# Altium PCB PCB2.PcbDoc
Units mm, origin at the board's own origin, x right, y up, seen from the top; angles counter-clockwise.
Board outline 55 x 110 mm, 2 copper layers (Top Layer, Bottom Layer); 8 components, 4 nets, 68 pads, 79 vias.
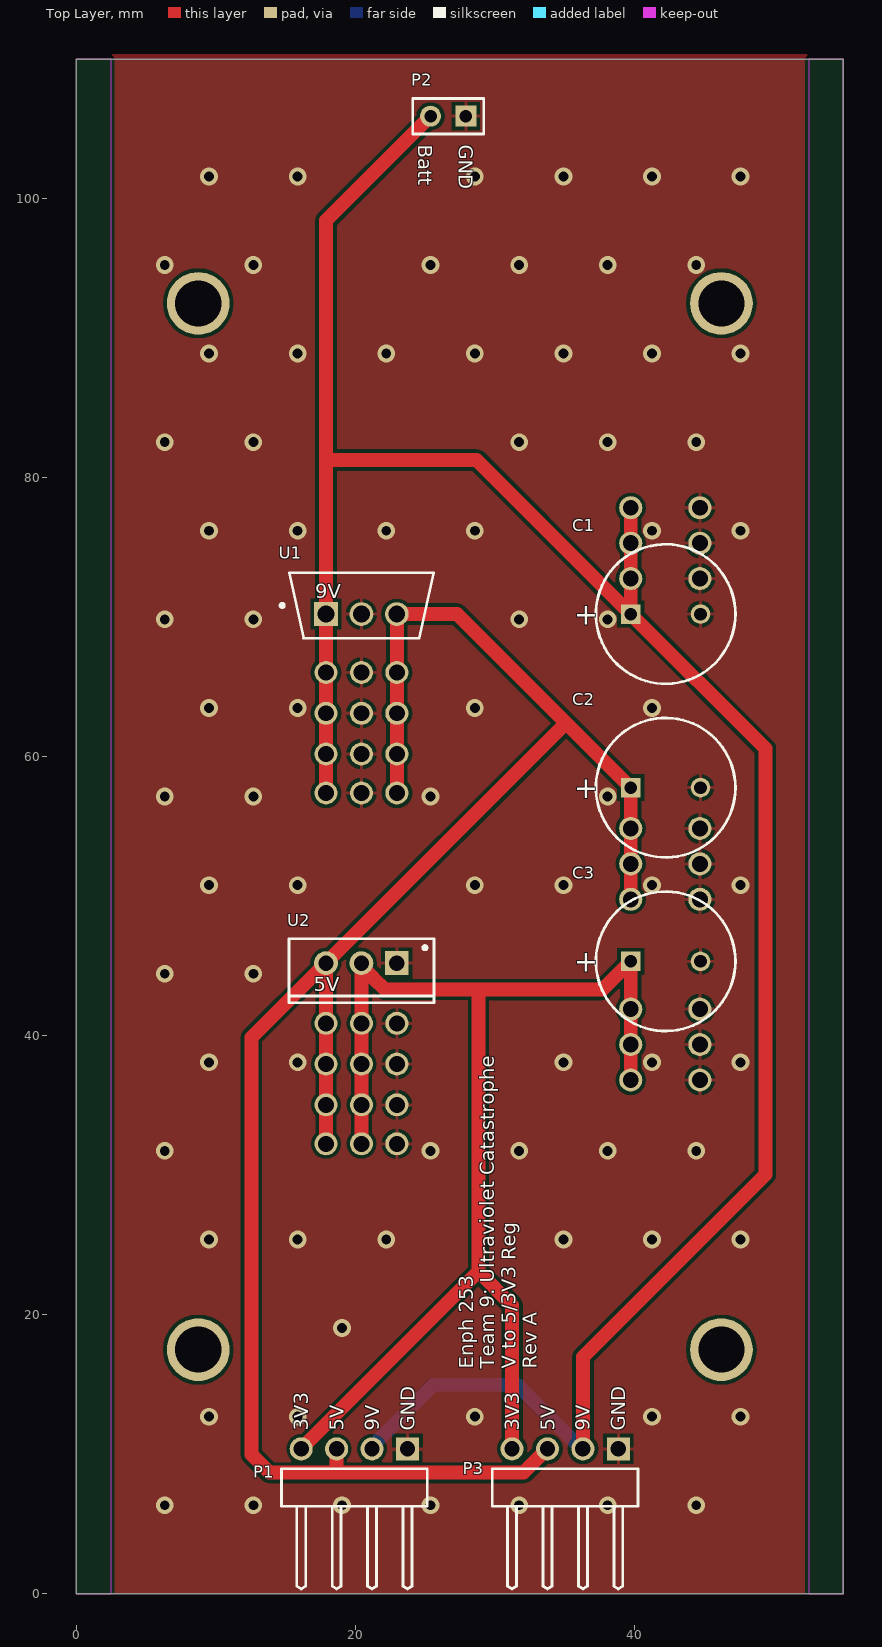
[diagram p0: Top Layer view]
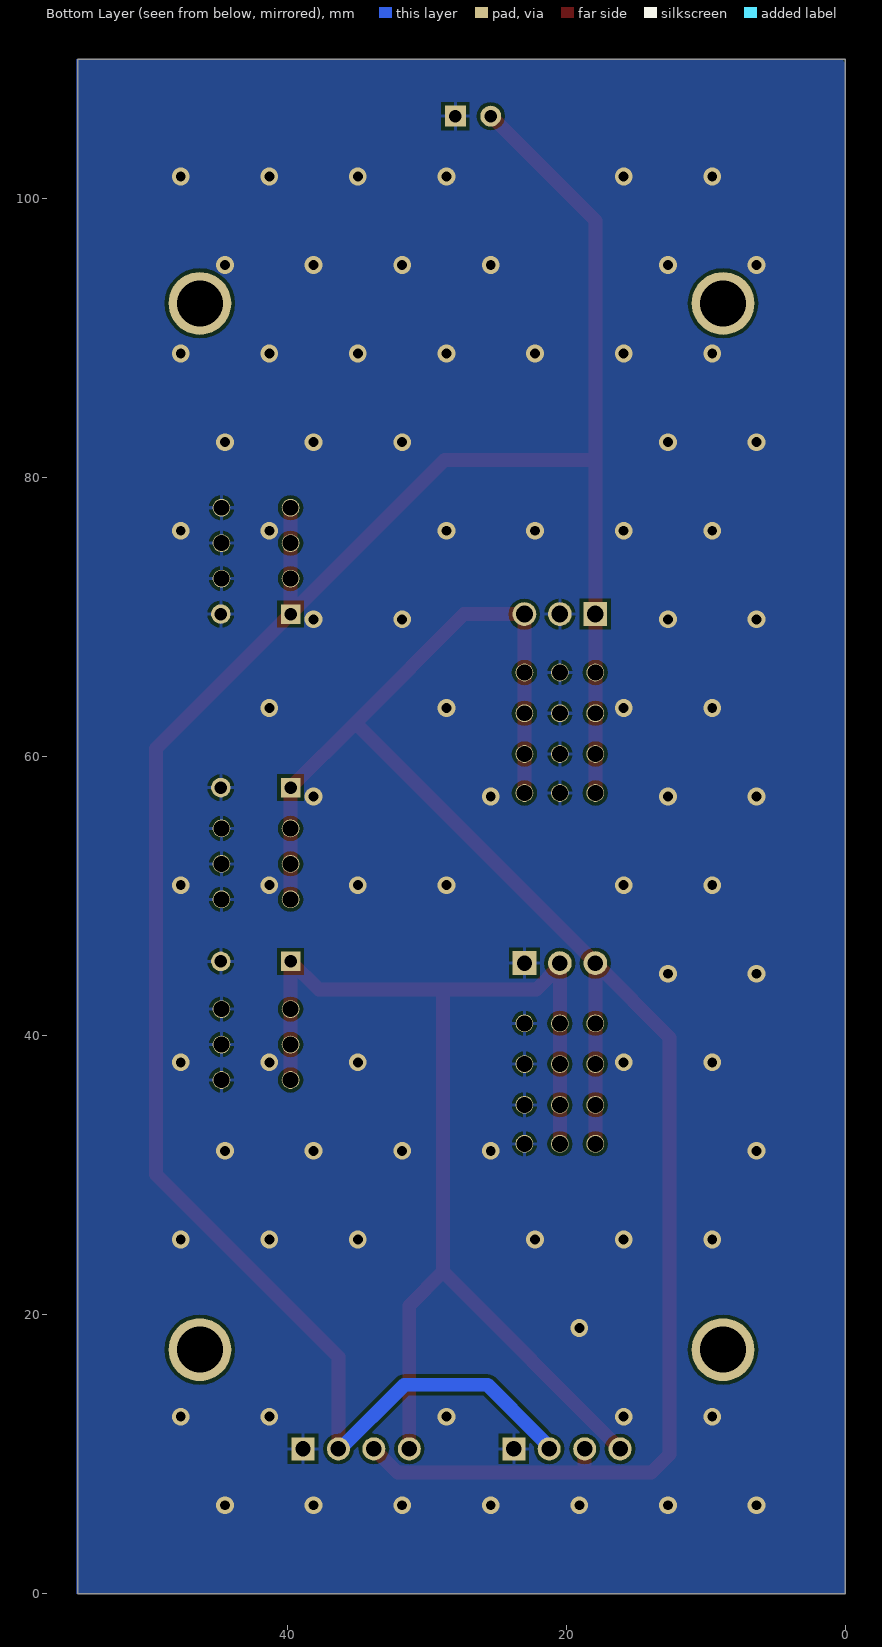
[diagram p1: Bottom Layer view, seen from below]

## Layer stack, top to bottom
Top Solder: solder mask 0.0102, Solder Resist, Dk 3.5
Top Layer: signal copper 0.0356
Dielectric 1: dielectric 0.32, FR-4, Dk 4.8
Bottom Layer: signal copper 0.0356
Bottom Solder: solder mask 0.0102, Solder Resist, Dk 3.5

## Board outline
0,0 0,110 55,110 55,0

## Design rules (kind name [scope] priority, off if disabled: settings)
Clearance [All] p1: gap=0.254 ignorepadtopadclearanceinfootprint=FALSE except(0: Arc-Hole Track-Hole SMDPad-Hole THPad-Hole Via-Hole Fill-Hole Poly-Hole Region-Hole Text-Hole)
PolygonConnect [All] p1: connectstyle=Relief reliefconductorwidth=0.254 reliefentries=4 polygonreliefangle="90 Angle" airgapwidth=0.254
RoutingVias [All] p1: holewidth=0.711 width=1.27 viastyle="Through Hole" minholewidth=0.711 minwidth=1.27 maxholewidth=0.711 maxwidth=1.27
SolderMaskExpansion [All] p1: expansion=0.102 istentingtop=FALSE
Width Width_Power [InNet('5V')   or InNet('3.3V')or InNet('9V')or InNet('GND')] p1: maxlimit=1 minlimit=1 preferedwidth=1 minimp=50.000000 maximp=50.000000 favimp=50.000000
Width [All] p2: maxlimit=0.254 minlimit=0.254 preferedwidth=0.254
30 further rules are at their usual default settings.

## Components (designator, comment, footprint, x,y, rotation, side; value= is the part's Value field where it differs from the comment)
C1 "ECA-2AM101" CAPPR65-500-1600X1000X1700 42.251,70.231 r0 top locked value=100µF
C2 "ECA-2AM101" CAPPR65-500-1600X1000X1700 42.251,57.785 r0 top locked value=100µF
C3 "ECA-2AM101" CAPPR65-500-1600X1000X1700 42.251,45.339 r0 top locked value=100µF
P1 "61300411021" 61300411021 19.939,7.62 r0 top locked
P2 "Header 2" HDR1X2 27.94,105.918 r180 top locked
P3 "61300411021" 61300411021 35.052,7.62 r0 top locked
U1 "UA7805CKCS" FP-KCS0003B-MFG 20.447,70.848 r90 top locked
U2 "LD1117V33" TO220 20.447,45.212 r180 top locked

## Footprints (in the part's own frame and the unit in brackets; to place one, negate y for a bottom-side part, rotate by r counter-clockwise, add the part's x,y. Pads: shape width x height; smd on the part's side, far side on the other; paste and mask are expansions set on the pad)
61300411021 [mm] "Pin Header, pitch 2.54 mm, THT, Angled, single row, 4p"
  rect 1.65x1.65 hole 1.1: 1(3.81,2.77)
  round 1.65 hole 1.1: 2(1.27,2.77) 3(-1.27,2.77) 4(-3.81,2.77)
  silkscreen extent -5.23,-7.27 5.23,1.35, body extent -5.08,-7.27 5.08,3.09, height 2.58
CAPPR65-500-1600X1000X1700 [mm] "THD, 2-Leads, Dia 10mm, Body Length 16mm"
  rect 1.4x1.4 hole 0.9: 1(-2.5,0)
  round 1.4 hole 0.9: 2(2.5,0)
  silkscreen extent -5,-5 5,5, body extent -5,-5 4.95,5, height 17
FP-KCS0003B-MFG [mm]
  rect 1.7x1.7 hole 1.2 paste-1000 mask+0: 1(-0.617,2.54)
  round 1.7 hole 1.2 paste-1000 mask+0: 2(-0.617,0) 3(-0.617,-2.54)
  silkscreen extent -2.35,-5.18 2.35,5.8, body extent -2.45,-5.28 2.45,5.28, height 0.25
HDR1X2 [mm] "Connector; Header; 2 Position"
  rect 1.5x1.5 hole 0.9: 1(0,0)
  round 1.5 hole 0.9: 2(2.54,0)
  silkscreen extent -1.27,-1.27 3.81,1.27
TO220 [mm] "TO, Thru-Hole, Vertical, Heatsink Mounted; 3 In-Line Leads; Pitch 2.54 mm"
  rect 1.7x1.7 hole 1.1: 1(-2.54,0)
  round 1.7 hole 1.1: 2(0,0) 3(2.54,0)
  silkscreen extent -5.2,-1.75 5.2,2.85, body extent -5.25,-1.8 5.25,2.9, height 19.7

## Part data
C1 C2 C3: library part CMP-001-00034-7, "Aluminum Electrolytic Capacitor, 100 uF, +/- 20%, 100 V, -40 to 85 degC, 2-Pin THD, RoHS, Bulk", Capacitor Type=Electrolytic, Case/Package=Radial, Manufacturer=Panasonic, Max Operating Temperature=85°C, Min Operating Temperature=-40°C, Package Description="2-Pin Through Hole Device, Dia 10 mm, Body Length 16 mm", Package Quantity=200, Package Reference=CAPPR65-500-1600X1000X1700, Ripple Current=350mA, Tolerance=20%, Voltage Rating=100V, Datasheet URL=https://industrial.panasonic.com/cdbs/www-data/pdf/RDF0000/ABA0000C1047.pdf, Datasheet Version=Mar-16, Diameter=10mm, Lead Pitch=5mm, Manufacturer URL=http://www.panasonic.com/, Mounting Technology=TH, Packaging=Bulk, Pins=2, Ripple Current (AC)=350mA, RoHS Compliant=True
P1 P3: library part CMP-1502-01063-1, "THT Angled Pin Header WR-PHD, Pitch 2.54 mm, Single Row, 4 pins", Contact Resistance=20mOhm, Manufacturer="Wurth Elektronik", Operating Temperature=-40to105degC, Rated Current=3A, Withstanding Voltage=500VAC, Working Voltage=250VAC, Datasheet URL=https://katalog.we-online.de/em/datasheet/6130xx11021.pdf, Gender=Male, Manufacturer URL=http://www.we-online.de, Mounting Technology=THT, Orientation=Angled, Package Reference=61300411021, Packaging=Bag, Part Number=61300411021, Pin Number=4, Pitch=2.54mm, Publisher=WurthElektronik, Row Number=Single
P2: "Header, 2-Pin", LatestRevisionDate=17-Jul-2002, LatestRevisionNote="Re-released for DXP Platform.", Publisher="Altium Limited"
U1: library part CMP-04917-000031-1, "IC REG LINEAR 5V 1.5A TO220-3", Dropout Voltage=2V, Manufacturer="Texas Instruments", Max Junction Temp=+125°C, Max Supply Voltage=25V, Min Supply Voltage=7V, Output Current=1.5A, Output Voltage=5V, Package=KCS0003B, Temperature="0°C to +125°C", Temperature Range Low=0°C, Automotive=No, Category=IC, ComponentLink2Description=Datasheet, ComponentLink2URL=http://www.ti.com/lit/ds/symlink/ua78.pdf, Device Class L1="Integrated Circuits (ICs)", Device Class L2="Power Management ICs", Device Class L3="Voltage Regulators - Linear", Digikey Description="IC REG LINEAR 5V 1.5A TO220-3", Height=19.65mm, Ipc Land Pattern Name=TO-220, Lead Free=Yes, Manufacturer Part Number=UA7805CKCS, Mouser Description="1.5-A, 40-V, Fixed Positive Linear Regulators 3-TO-220 0 to 125", Number Of Outputs=1, Octopart=https://octopart.com/ua7805ckcs-texas+instruments-525328, Output Type=Fixed, RoHS=TRUE, Temperature Range High=+125°C
U2: library part CMP-0244-00470-1, "Fixed Low Drop Positive Voltage Regulator, 3.3V, 3-Pin TO-220", ComponentLink1Description="Manufacturer URL", ComponentLink1URL=http://www.st.com, ComponentLink2Description=Datasheet, ComponentLink2URL=http://www.st.com/internet/com/TECHNICAL_RESOURCES/TECHNICAL_LITERATURE/DATASHEET/CD00000544.pdf, ComponentLink3Description="Package Specification", ComponentLink3URL=http://www.st.com/internet/com/TECHNICAL_RESOURCES/TECHNICAL_LITERATURE/PACKAGE_INFORMATION/CD00004649.pdf, DatasheetVersion=1/11/2011, PackageDescription="TO, Thru-Hole, Vertical, Heatsink Mounted; 3 In-Line Leads; Pitch 2.54 mm", PackageReference=TO220, PackageVersion=ver3.0

## Free pads (board coordinates)
  round 4.5 hole 3.3: 12(8.75,17.5) 12(8.75,92.5) 13(46.25,17.5) 13(46.25,92.5)
  round 1.651 / inner rrect50% 1.702x1.27 / far side round 1.27 hole 1.143: 14(17.907,32.258) 14(17.907,35.052) 14(17.907,37.973) 14(17.907,40.894) 14(17.907,57.404) 14(17.907,60.198) 14(17.907,63.119) 14(17.907,66.04) 14(20.447,32.258) 14(20.447,35.052) 14(20.447,37.973) 14(20.447,40.894) 14(20.447,57.404) 14(20.447,60.198) 14(20.447,63.119) 14(20.447,66.04) 14(22.987,32.258) 14(22.987,35.052) 14(22.987,37.973) 14(22.987,40.894) 14(22.987,57.404) 14(22.987,60.198) 14(22.987,63.119) 14(22.987,66.04) 14(39.751,36.83) 14(39.751,39.37) 14(39.751,41.91) 14(39.751,49.784) 14(39.751,52.324) 14(39.751,54.864) 14(39.751,72.771) 14(39.751,75.311) 14(39.751,77.851) 14(44.704,36.83) 14(44.704,39.37) 14(44.704,41.91) 14(44.704,49.784) 14(44.704,52.324) 14(44.704,54.864) 14(44.704,72.771) 14(44.704,75.311) 14(44.704,77.851)

## Via types
v1: diameter 1.27, hole 0.711, Top Layer to Bottom Layer, tented both sides, 79 vias

## Nets (pads, with @x,y where several pads share a name; then routed paths per layer and width w, separated by ;. In a path a pad name is that pad's centre, name@x,y a point inside that pad or via, vN(x,y) a via of type N, cw(c..) or ccw(c..) an arc to the next point about the centre after c; other vN are vias at no path point)
3.3V: C3.1 P1.4 P3.4 pad.14@20.447,32.258 pad.14@20.447,35.052 pad.14@20.447,37.973 pad.14@20.447,40.894 pad.14@39.751,36.83 pad.14@39.751,39.37 pad.14@39.751,41.91 U2.2 | length 94.3
  Top Layer w1: P1.4 28.829,23.09 ; pad.14@20.447,32.258 20.447,35.052 20.447,37.973 20.447,40.894 U2.2@20.447,45.023 ; U2.2 U2.2@20.447,45.023 ; P3.4@31.242,10.265 31.242,20.677 28.829,23.09 ; pad.14@39.751,36.83 39.751,39.37 39.751,41.91 C3.1 37.719,43.307 28.829,43.307 ; U2.2@20.447,45.023 21.288,44.182 21.288,44.145 22.126,43.307 28.829,43.307 ; 28.829,23.09 28.829,43.307
5V: C2.1 P1.3 P3.3 pad.14@17.907,32.258 pad.14@17.907,35.052 pad.14@17.907,37.973 pad.14@17.907,40.894 pad.14@22.987,57.404 pad.14@22.987,60.198 pad.14@22.987,63.119 pad.14@22.987,66.04 pad.14@39.751,49.784 pad.14@39.751,52.324 pad.14@39.751,54.864 U1.3 U2.3 | length 141.7
  Top Layer w1: pad.14@17.907,32.258 17.907,35.052 17.907,37.973 17.907,40.894 U2.3 ; P1.3 18.669,8.686 ; pad.14@22.987,57.404 22.987,60.198 22.987,63.119 22.987,66.04 U1.3 27.305,70.231 34.925,62.611 ; P3.3@33.782,10.265 33.652,10.265 32.073,8.686 18.669,8.686 ; pad.14@39.751,49.784 39.751,52.324 39.751,54.864 C2.1 34.925,62.611 ; U2.3 12.573,39.878 12.573,9.984 13.871,8.686 18.669,8.686 ; U2.3 34.925,62.23 34.925,62.611
9V: C1.1 P1.2 P2.2 P3.2 pad.14@17.907,57.404 pad.14@17.907,60.198 pad.14@17.907,63.119 pad.14@17.907,66.04 pad.14@39.751,72.771 pad.14@39.751,75.311 pad.14@39.751,77.851 U1.1 | length 174.1
  Top Layer w1: pad.14@17.907,57.404 17.907,60.198 17.907,63.119 17.907,66.04 U1.1 17.907,81.28 ; P2.2 17.907,98.425 17.907,81.28 ; P3.2@36.322,10.265 36.322,16.971 49.403,30.052 49.403,60.579 C1.1 ; pad.14@39.751,77.851 39.751,75.311 39.751,72.771 C1.1 ; 17.907,81.28 28.702,81.28 C1.1
  Bottom Layer w1: P1.2 21.209,10.566 22.04,11.397 ; 22.04,11.398 25.629,14.986 31.601,14.986 P3.2@36.322,10.265
GND: C1.2 C2.2 C3.2 P1.1 P2.1 P3.1 pad.14@20.447,57.404 pad.14@20.447,60.198 pad.14@20.447,63.119 pad.14@20.447,66.04 pad.14@22.987,32.258 pad.14@22.987,35.052 pad.14@22.987,37.973 pad.14@22.987,40.894 pad.14@44.704,36.83 pad.14@44.704,39.37 pad.14@44.704,41.91 pad.14@44.704,49.784 pad.14@44.704,52.324 pad.14@44.704,54.864 pad.14@44.704,72.771 pad.14@44.704,75.311 pad.14@44.704,77.851 U1.2 U2.1
  other v1: 6.35,6.35 12.7,6.35 19.05,6.35 25.4,6.35 31.75,6.35 38.1,6.35 44.45,6.35 9.525,12.7 15.875,12.7 28.575,12.7 41.275,12.7 47.625,12.7 19.05,19.05 9.525,25.4 15.875,25.4 22.225,25.4 34.925,25.4 41.275,25.4 47.625,25.4 6.35,31.75 25.4,31.75 31.75,31.75 38.1,31.75 44.45,31.75 9.525,38.1 15.875,38.1 34.925,38.1 41.275,38.1 47.625,38.1 6.35,44.45 12.7,44.45 9.525,50.8 15.875,50.8 28.575,50.8 34.925,50.8 41.275,50.8 47.625,50.8 6.35,57.15 12.7,57.15 25.4,57.15 38.1,57.15 9.525,63.5 15.875,63.5 28.575,63.5 41.275,63.5 6.35,69.85 12.7,69.85 31.75,69.85 38.1,69.85 9.525,76.2 15.875,76.2 22.225,76.2 28.575,76.2 41.275,76.2 47.625,76.2 6.35,82.55 12.7,82.55 31.75,82.55 38.1,82.55 44.45,82.55 9.525,88.9 15.875,88.9 22.225,88.9 28.575,88.9 34.925,88.9 41.275,88.9 47.625,88.9 6.35,95.25 12.7,95.25 25.4,95.25 31.75,95.25 38.1,95.25 44.45,95.25 9.525,101.6 15.875,101.6 28.575,101.6 34.925,101.6 41.275,101.6 47.625,101.6

## Polygon pours and split planes (outlines as drawn)
GND on Bottom Layer "GND_L02_P000" (solid, pour order 0): 0,109.728 0.254,109.982 55.118,109.982 55.118,0 0,0
GND on Top Layer "GND_L01_P001" (solid, pour order 1): 0.127,110.363 54.864,110.363 55,110.227 55,0 0,0

## Keep-outs
Top Layer:
  rectangle: 0,0 2.5,110
  rectangle: 52.5,0 55,110

## Silkscreen, mask and mechanical layers (free items; w line width, h text height)
Top Overlay:
  text "Batt" at 24.511,103.886 h1.02 r270
  text "GND" at 27.432,103.886 h1.02 r270
  text "9V" at 17.145,71.374 h1.02
  text "5V" at 17.018,43.18 h1.02
  text "Enph 253  / Team 9: Ultraviolet Catastrophe / V to 5/3V3 Reg / Rev A" at 33.02,16.129 h1.02 r90
  text "3V3" at 16.637,11.684 h1.02 r90
  text "5V" at 19.177,11.684 h1.02 r90
  text "9V" at 21.717,11.684 h1.02 r90
  text "GND" at 24.257,11.684 h1.02 r90
  text "3V3" at 31.75,11.684 h1.02 r90
  text "5V" at 34.29,11.684 h1.02 r90
  text "9V" at 36.83,11.684 h1.02 r90
  text "GND" at 39.37,11.684 h1.02 r90
Mechanical 1:
  the board outline again, w0.254

## Dimensions
55,0 to 38.862,10.39 on Mechanical 1
8.75,17.5 to 46.25,17.5 on Mechanical 1
20.447,70.231 to 20.447,45.212 on Mechanical 1
0,0 to 16.129,10.39 on Mechanical 1
27.94,105.918 to 0,110 on Mechanical 1
9.998,92.663 to -0.002,110.163 on Mechanical 1
46.25,17.5 to 46.25,92.5 on Mechanical 1
8.75,92.5 to 0,110 on Mechanical 1
46.25,92.5 to 55,110 on Mechanical 1
46.25,92.5 to 55,110 on Mechanical 1
8.75,92.5 to 0,110 on Mechanical 1
8.75,92.5 to 46.25,92.5 on Mechanical 1
55,0 to 55,110 on Mechanical 1
0,0 to 55,0 on Mechanical 1
46.25,17.5 to 55,0 on Mechanical 1
8.75,17.5 to 0,0 on Mechanical 1
0,0 to 8.75,17.5 on Mechanical 1
46.25,17.5 to 55,0 on Mechanical 1

## Text inside footprints (layer, text, board x,y; h text height)
C1: Top Overlay "+" at 35.701,69.481 h1.5
C2: Top Overlay "+" at 35.701,57.035 h1.5
C3: Top Overlay "+" at 35.701,44.589 h1.5